# Altium PCB PFTS-IN3-PCBV1.PcbDoc
Units mil, origin at the board's own origin, x right, y up, seen from the top; angles counter-clockwise.
Board outline 551.2 x 393.73 mil, 2 copper layers (Top Layer, Bottom Layer); 1 components, 2 nets, 5 pads, 2 vias.
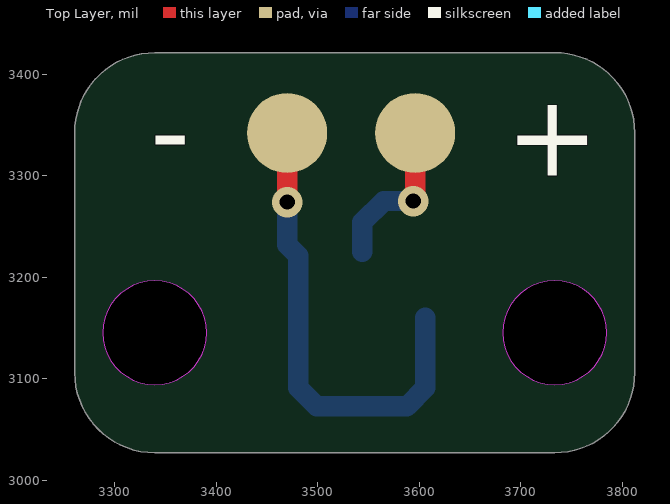
[diagram p0: Top Layer view]
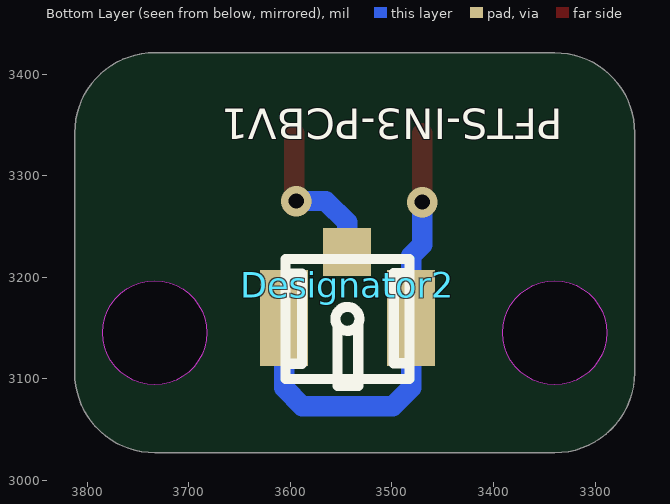
[diagram p1: Bottom Layer view, seen from below]

## Layer stack, top to bottom
Top Solder: solder mask 0.4, Solder Resist, Dk 3.5
Top Layer: signal copper 1.4
Dielectric 1: dielectric 12.6, FR-4, Dk 4.8
Bottom Layer: signal copper 1.4
Bottom Solder: solder mask 0.4, Solder Resist, Dk 3.5

## Board outline
3260.92,3105.96 3260.9,3342.18 cw(c3339.64,3342.18) 3339.64,3420.92 3733.34,3420.96 cw(c3733.34,3342.22) 3812.08,3342.22 3812.1,3106 cw(c3733.36,3106) 3733.37,3027.25 3339.67,3027.22 cw(c3339.66,3105.96)
cut-out: 3682.18,3145.37 ccw(c3733.36,3145.37) 3733.36,3094.18 ccw(c3733.36,3145.37) 3784.54,3145.37 ccw(c3733.36,3145.37) 3733.36,3196.55 ccw(c3733.36,3145.37)
cut-out: 3288.48,3145.33 ccw(c3339.66,3145.33) 3339.66,3094.15 ccw(c3339.66,3145.33) 3390.84,3145.33 ccw(c3339.66,3145.33) 3339.66,3196.51 ccw(c3339.66,3145.33)

## Design rules (kind name [scope] priority, off if disabled: settings)
Clearance [All] p1: gap=10 ignorepadtopadclearanceinfootprint=FALSE
PolygonConnect [All] p1: connectstyle=Relief reliefconductorwidth=10 reliefentries=4 polygonreliefangle="90 Angle" airgapwidth=10
RoutingVias [All] p1: holewidth=28 width=50 viastyle="Through Hole" minholewidth=15 minwidth=30 maxholewidth=28 maxwidth=50
SolderMaskExpansion [All] p1: expansion=4
Width [All] p1: maxlimit=100 minlimit=10 preferedwidth=10
30 further rules are at their usual default settings.

## Components (designator, comment, footprint, x,y, rotation, side; value= is the part's Value field where it differs from the comment)
Designator2 "Comment" U.FL-R-SMT-1(10) 3481,3160 r0 bottom

## Footprints (in the part's own frame and the unit in brackets; to place one, negate y for a bottom-side part, rotate by r counter-clockwise, add the part's x,y. Pads: shape width x height; smd on the part's side, far side on the other; paste and mask are expansions set on the pad)
U.FL-R-SMT-1(10) [mm]
  rect 1.2x2.4 smd: 1(0,0) 3(3.175,0)
  rect 1.2x1.2 smd: 2(1.6,-1.651)
  silkscreen extent 0.04,-1.47 3.14,1.71, body extent 0.07,-1.5 3.07,1.6, height 1.25

## Free pads (board coordinates)
  round 78.74 smd: 4(3470,3342) 5(3596,3342)

## Via types
v1: diameter 30, hole 15, Top Layer to Bottom Layer, 2 vias

## Nets (pads, with @x,y where several pads share a name; then routed paths per layer and width w, separated by ;. In a path a pad name is that pad's centre, name@x,y a point inside that pad or via, vN(x,y) a via of type N, cw(c..) or ccw(c..) an arc to the next point about the centre after c; other vN are vias at no path point)
+: Designator2.2 pad.5 | length 155.5
  Top Layer w20: v1(3594,3275) 3596,3277 pad.5
  Bottom Layer w20: Designator2.2 3544,3254 3565,3275 v1(3594,3275)
-: Designator2.1 Designator2.3 pad.4 | length 464.5
  Top Layer w20: v1(3470,3274) pad.4
  Bottom Layer w20: v1(3470,3274) 3470,3232 3481,3221 Designator2.1 3481,3091 3499,3073 3588,3073 3606,3091 Designator2.3

## Silkscreen, mask and mechanical layers (free items; w line width, h text height)
Top Overlay:
  text "-" at 3335,3305 h80
  text "+" at 3685,3300 h80
Bottom Overlay:
  text "PFTS-IN3-PCBV1" at 3332,3366 h30 r180
Mechanical 1:
  circle w0.5: c3339.66,3145.33 r51.18
  circle w0.5: c3733.36,3145.37 r51.18
  lines w0.5: 3260.92,3105.96 ccw(c3339.66,3105.96) 3339.67,3027.22 3733.37,3027.25 ccw(c3733.36,3106) 3812.1,3106 3812.08,3342.22 ccw(c3733.34,3342.22) 3733.34,3420.96 3339.64,3420.92 ccw(c3339.64,3342.18) 3260.9,3342.18 3260.92,3105.96